# Altium PCB ford_giraffe.pcbdoc
Units mil, origin at the board's own origin, x right, y up, seen from the top; angles counter-clockwise.
Board outline 7359.99 x 1959 mil, 2 copper layers (Top Layer, Bottom Layer); 6 components, 19 nets, 79 pads, 31 vias.
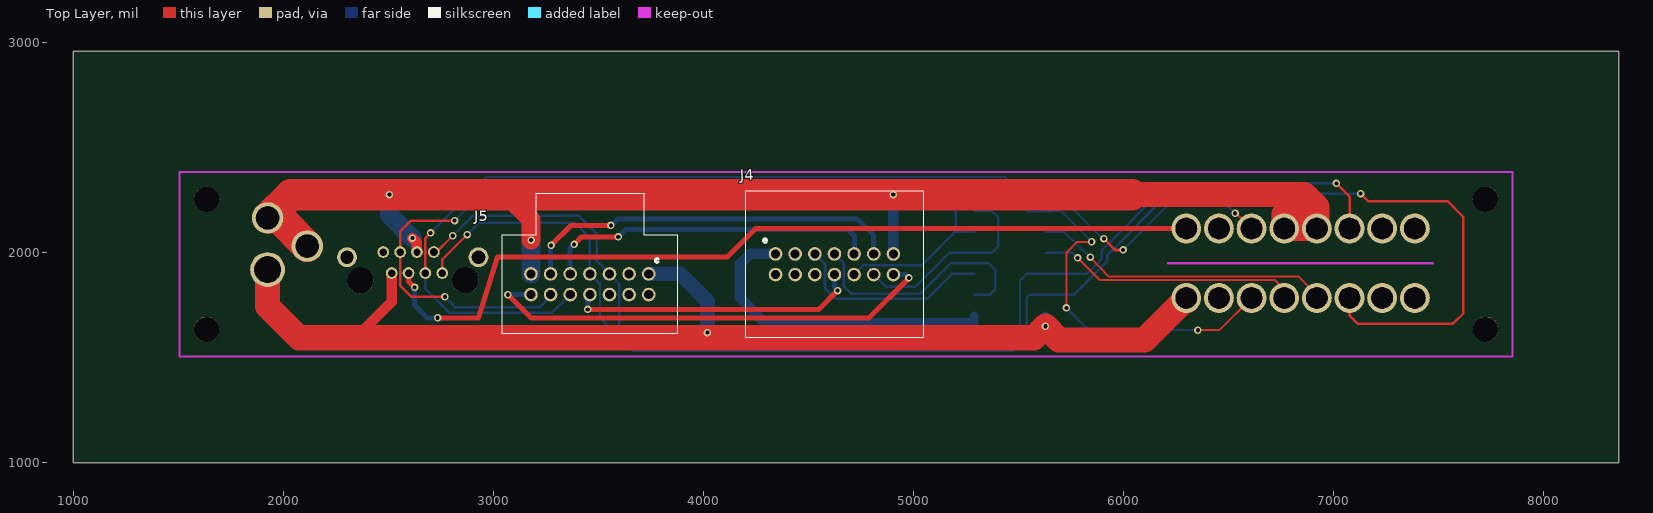
[diagram p0: Top Layer view]
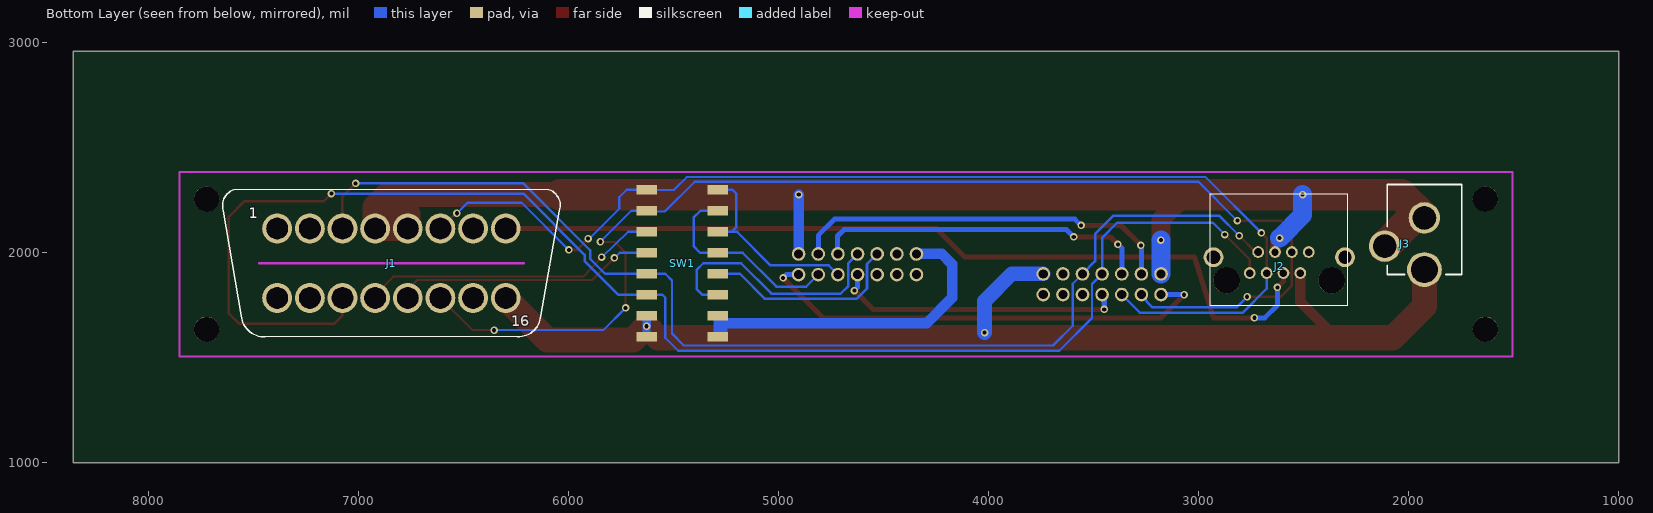
[diagram p1: Bottom Layer view, seen from below]

## Layer stack, top to bottom
Top Layer: signal copper (thickness not stored)
Dielectric: dielectric 12.6, FR-4, Dk 4.8
Bottom Layer: signal copper (thickness not stored)

## Board outline
8359.99,1000 1000,1000 1000,2959 8359.99,2959

## Components (designator, comment, footprint, x,y, rotation, side; value= is the part's Value field where it differs from the comment)
J1 "OBDII-FEMALE-CUT" OBDII-FEMALE-MIDCUT 6844.99,1950 r0 bottom
J2 "VERT_RJ45" GLX-S-88M 2620,2065 r0 bottom
J3 "_" DCJACK_2MM_PTH 1925,2455 r0 bottom
J4 "CAM" 2X7-FORD-CAR 4624.99,1945 r0 top
J5 "CAR" 2X7-FORD-CAM 3460,1850 r0 top
SW1 "4XDPSTSMT" 4-DPST 5459.99,1950 r270 bottom

## Footprints (in the part's own frame and the unit in brackets; to place one, negate y for a bottom-side part, rotate by r counter-clockwise, add the part's x,y. Pads: shape width x height; smd on the part's side, far side on the other; paste and mask are expansions set on the pad)
2X7-FORD-CAM [mm]
  round 1.65 hole 1.1: 1(7.125,1.25) 2(4.75,1.25) 3(2.375,1.25) 4(0,1.25) 5(-2.375,1.25) 6(-4.75,1.25) 7(-7.125,1.25) 8(7.125,-1.25) 9(4.75,-1.25) 10(2.375,-1.25) 11(0,-1.25) 12(-2.375,-1.25) 13(-4.75,-1.25) 14(-7.125,-1.25)
  silkscreen extent -10.6,-6 10.6,11
2X7-FORD-CAR [mm]
  round 1.65 hole 1.1: 1(-7.125,1.25) 2(-4.75,1.25) 3(-2.375,1.25) 4(0,1.25) 5(2.375,1.25) 6(4.75,1.25) 7(7.125,1.25) 8(-7.125,-1.25) 9(-4.75,-1.25) 10(-2.375,-1.25) 11(0,-1.25) 12(2.375,-1.25) 13(4.75,-1.25) 14(7.125,-1.25)
  silkscreen extent -10.75,-8.9 10.75,8.9
4-DPST [mil]
  rect 44.5x96 smd: 1(-350,-169.29) 2(-250,-169.29) 3(-150,-169.29) 4(-50,-169.29) 13(-50,169.29) 14(-150,169.29) 15(-250,169.29) 16(-350,169.29)
  rect 44.4x96 smd: 5(50,-169.29) 6(150,-169.29) 7(250,-169.29) 8(350,-169.29) 9(350,169.29) 10(250,169.29) 11(150,169.29) 12(50,169.29)
DCJACK_2MM_PTH [mm]
  round 3.816 hole 2.8 slot 2.805 at 0 deg: GND(0,7.35)
  round 3.816 hole 2.8 slot 2.805 at 90 deg: GNDBREAK(4.8,10.75)
  round 4.216 hole 3.2 slot 3.205 at 0 deg: PWR(0,13.6)
  silkscreen extent -4.5,3.3 4.5,14.2
GLX-S-88M [mil]
  round 56 hole 35.44: 1(-144.1,61.81) 2(-103.94,161.81) 3(-63.78,61.81) 4(-23.62,161.81) 5(16.53,61.81) 6(56.69,161.81) 8(137.01,161.81)
  round 56 hole 35.44 slot 35.54 at 0 deg: 7(96.85,61.81)
  round 94.49 hole 63: S1(-316.54,86.62)
  round 94.49 hole 63 slot 63.1 at 0 deg: S2(309.45,86.62)
  round 125.98 hole 125.98 unplated: ""(-253.55,196.85) ""(246.45,196.85)
  silkscreen extent -331,-213 327,315
OBDII-FEMALE-MIDCUT [mm]
  round 3.616 hole 2.6 slot 2.605 at 0 deg: 1(13.825,-4.2) 2(9.875,-4.2) 3(5.925,-4.2) 4(1.975,-4.2) 5(-1.975,-4.2) 6(-5.925,-4.2) 7(-9.875,-4.2) 8(-13.825,-4.2) 9(13.825,4.2) 10(9.875,4.2) 11(5.925,4.2) 12(1.975,4.2) 13(-1.975,4.2) 14(-5.925,4.2) 15(-9.875,4.2) 16(-13.825,4.2)
  Keep-Out Layer lines w0.254: -16,0 16,0
  silkscreen extent -20.42,-8.89 20.42,8.89

## Free pads (board coordinates)
  round 120 hole 120 unplated: ""(1635,1635) ""(1635,2255) ""(7724.99,1635) ""(7724.99,2255)

## Via types
v1: diameter 35.69, hole 19.68, Top Layer to Bottom Layer, 31 vias

## Nets (pads, with @x,y where several pads share a name; then routed paths per layer and width w, separated by ;. In a path a pad name is that pad's centre, name@x,y a point inside that pad or via, vN(x,y) a via of type N, cw(c..) or ccw(c..) an arc to the next point about the centre after c; other vN are vias at no path point)
12VIN: J1.16 J2.2 J3.PWR J5.1 SW1.7 SW1.8 | length 5813.5
  Top Layer w40: v1(5629.99,1650) 5649.99,1650 5654.99,1655
  Top Layer w50: 2305,1595 2345,1595 2516.06,1766.06 J2.2
  Top Layer w70: 4019.99,1595 v1(4019.99,1620)
  Top Layer w120: J3.PWR 1925,1745 2075,1595 2305,1595 4019.99,1595 5574.99,1595 v1(5629.99,1650) 5694.99,1585 6101.05,1585 J1.16 J1.16@6300.7,1770.71
  Bottom Layer w40: SW1.8 5629.99,1600.71 v1(5629.99,1650) 5629.28,1650.71 SW1.7
  Bottom Layer w70: J5.1 3890.78,1899.21 4019.99,1770 v1(4019.99,1620)
12VIN': J4.1 SW1.9 SW1.10 | length 1665.2
  Bottom Layer w40: 5264.99,1665 5264.99,1625.71 SW1.9 SW1.10
  Bottom Layer w50: J4.1 4224.21,1994.21 4174.99,1945 4174.99,1785 4294.99,1665 5264.99,1665
CAN1_H: J1.6 J2.6 J5.12 SW1.1 | length 5391.1
  Top Layer w10: v1(6532.99,2188) 6539.08,2188 J1.6
  Top Layer w12: J2.6 2676.69,2069.69 v1(2701,2094) ; v1(5907.99,2067) 5961.99,2013 v1(5999.99,2013)
  Bottom Layer w10: v1(2701,2094) 2967,2360 5438.99,2360 5499.99,2299 SW1.1@5630.28,2299 ; SW1.1 SW1.1@5630.28,2299 ; v1(5907.99,2067) 5902.99,2067 5759.99,2210 5759.99,2265 5724.99,2300 5631.28,2300 SW1.1@5630.28,2299 ; v1(5999.99,2013) 6224.99,2238 6482.99,2238 v1(6532.99,2188)
  Bottom Layer w12: J2.6 2676.69,1828.31 2790,1715 3280.71,1715 J5.12
CAN1_H': J4.12 SW1.14 SW1.16 | length 945.3
  Bottom Layer w12: J4.12 4762.98,1940.27 4830.43,1940.27 4830.69,1940 4886.81,1940 4887.08,1940.27 4923.93,1940.27 4924.2,1940 5039.99,1940 5199.99,2100 ; 5198.99,2100 5199.99,2100 ; SW1.14 5224.99,2100 ; SW1.16 5220.99,2300 5201.99,2281 5201.99,2123 5224.99,2100 ; 5199.99,2100 5224.99,2100
CAN1_L: J1.14 J2.3 J5.13 SW1.2 | length 6005
  Top Layer w10: v1(5729.99,1737) 5729.99,2000 5781.99,2052 v1(5849.99,2052) ; v1(6355.99,1631) 6458.08,1631 J1.14
  Top Layer w12: v1(2770,1790) 2610,1790 2556.22,1843.78 J2.3 2556.22,2101.22 2608,2153 v1(2816,2153)
  Bottom Layer w10: v1(2816,2153) 3001,2338 5400.99,2338 5541.99,2197 SW1.2@5651.99,2197 ; SW1.2@5654.99,2200 SW1.2 5701.99,2200 v1(5849.99,2052) ; v1(5729.99,1737) 5835.99,1631 v1(6355.99,1631)
  Bottom Layer w12: v1(2770,1790) 2820,1740 3220,1740 3272.99,1792.99 J5.13 ; SW1.2@5651.99,2197 SW1.2@5654.99,2200
CAN1_L': J4.13 SW1.13 SW1.15 | length 962.4
  Bottom Layer w12: J4.13 4869.29,1838.5 5011.49,1838.5 5172.99,2000 SW1.13 5374.99,2000 5405.99,2031 5405.99,2167 5372.99,2200 SW1.15
CAN2_H: J1.3 J2.7 J5.3 SW1.5 | length 5553.9
  Top Layer w12: J2.7 2729.19,2003.19 v1(2807,2081) ; v1(7015.99,2330) 7078.26,2267.73 J1.3
  Bottom Layer w10: J5.3 3600,1852.72 3600,1652 3694,1558 5451.99,1558 5508.99,1615 5508.99,1868 5540.99,1900 SW1.5
  Bottom Layer w12: v1(2807,2081) 2903,2177 3405,2177 3493,2089 3493,1959.72 J5.3 ; SW1.5 5630.28,1899 5754.99,1899 5778.99,1899 5826.68,1899 5898.83,1971.16 5898.83,2011.84 6216.99,2330 v1(7015.99,2330)
CAN2_H': J4.3 SW1.12 | length 965.4
  Bottom Layer w12: J4.3 4579.99,1945.71 4579.99,1830 4629.99,1780 5064.99,1780 5184.99,1900 SW1.12
CAN2_L: J1.11 J2.8 J5.4 SW1.6 | length 7056.3
  Top Layer w12: J2.8 2757.01,1967.01 v1(2876,2086) ; J1.11 7078.26,1700.73 7116.99,1662 7570.99,1662 7619.99,1711 7619.99,2171 7544.99,2246 7166.99,2246 v1(7130.99,2282)
  Bottom Layer w10: J5.4 3508,1851.21 3508,1689 3664,1533 5478.99,1533 5540.99,1595 5540.99,1787 5553.99,1800 SW1.6
  Bottom Layer w12: v1(2876,2086) 2933,2143 3388,2143 3460,2071 J5.4 ; SW1.6 5764.99,1800 5924.99,1960 5924.99,1990 6216.99,2282 v1(7130.99,2282)
CAN2_L': J4.4 SW1.11 | length 1184.5
  Bottom Layer w12: J4.4 4669.99,1949.21 4669.99,1840 4704.99,1805 5034.99,1805 5179.99,1950 5359.99,1950 5389.99,1920 5389.99,1825 5364.99,1800 SW1.11
CAN3_H: J1.12 SW1.3 | length 1433.3
  Top Layer w10: v1(5843.99,1979) 5931.99,1886 6836.99,1886 6922.75,1800.24 J1.12
  Bottom Layer w10: SW1.3 5717.99,2100 v1(5843.99,1979)
CAN3_L: J1.13 SW1.4 | length 1251.2
  Top Layer w10: v1(5782.99,1975) 5887.99,1870 6722.99,1870 6767.23,1825.76 J1.13
  Bottom Layer w10: SW1.4 5757.99,2000 v1(5782.99,1975)
GND: J1.4 J1.5 J2.5 J3.GND J3.GNDBREAK J4.7 J5.7 | length 6939.6
  Top Layer w50: v1(2615,2070) 2636.53,2048.46 J2.5
  Top Layer w90: 3060,2277.01 3180,2157.01 v1(3180,2060)
  Top Layer w120: 6039.99,2277.01 6862.98,2277.01 6922.75,2217.24 ; 6812.99,2229 6767.23,2183.24 J1.5 ; J1.5 J1.4 6922.75,2217.24 ; J1.5 6820.86,2115.35 6922.75,2217.24
  Top Layer w150: J3.GNDBREAK 1980.12,2165.63 J3.GND 2036.38,2277.01 v1(2505,2277.01) 3060,2277.01 v1(4904.99,2277.01) 6039.99,2277.01
  Bottom Layer w50: v1(4904.99,2277.01) 4905.51,2276.49 J4.7
  Bottom Layer w90: v1(2505,2277.01) 2505,2180 v1(2615,2070) ; J5.7 3179.48,2044.49 v1(3180,2060)
IGN: J1.8 J2.4 | length 4135.3
  Top Layer w24: J2.4 2596.38,1863.62 v1(2625,1835) ; v1(2735,1690) 2930,1690 3020,1980 4114.99,1980 4249.99,2115 6300.34,2115 J1.8
  Bottom Layer w24: v1(2625,1835) 2625,1750 2685,1690 v1(2735,1690)
LDW_HFW+: J4.11 J5.11 | length 1384.2
  Top Layer w24: v1(3450,1730) 4549.99,1730 v1(4639.99,1820)
  Bottom Layer w24: v1(3450,1730) 3450,1790.79 J5.11 ; J4.11 4624.99,1835 v1(4639.99,1820)
LDW_HFW-: J4.14 J5.14 | length 2225.1
  Top Layer w24: v1(3070,1800) 3180,1690 4789.99,1690 v1(4979.99,1880)
  Bottom Layer w24: v1(3070,1800) 3070.78,1800.79 J5.14 ; J4.14 4964.21,1895.79 v1(4979.99,1880)
MOD_MIR+: J4.5 J5.5 | length 1611.3
  Top Layer w24: v1(3385,2040) 3420,2075 v1(3595,2075)
  Bottom Layer w24: J5.5 3366.49,2021.5 v1(3385,2040) ; v1(3595,2075) 3630,2110 4689.99,2110 4719.99,2080 4719.99,1995.71 J4.5
MOD_MIR-: J4.6 J5.6 | length 1846.1
  Top Layer w24: v1(3275,2035) 3370,2130 v1(3560,2130)
  Bottom Layer w24: J5.6 3272.99,2032.99 v1(3275,2035) ; v1(3560,2130) 3590,2160 4734.99,2160 4812,2082.99 J4.6
NC: J2.1
pads on no net: J1.1 J1.2 J1.7 J1.9 J1.10 J1.15 J2. J2.S1 J2.S2 J4.2 J4.8 J4.9 J4.10 J5.2 J5.8 J5.9 J5.10

## Text inside footprints (layer, text, board x,y; h text height)
J1: Bottom Overlay "1" at 7524.99,2163.03 h50; Bottom Overlay "16" at 6273.33,1650.59 h50 r359
J3: Document "DC 2.0/2.1" at 2082.44,2404.99 h32 r182